# Altium PCB yampad_v2(1).PcbDoc
Units mm, origin at the board's own origin, x right, y up, seen from the top; angles counter-clockwise.
Board outline 94.49 x 95 mm, 2 copper layers (F.Cu, B.Cu); 66 components, 49 nets, 261 pads, 64 vias.
Unrouted connection lines stored in the file: 2.
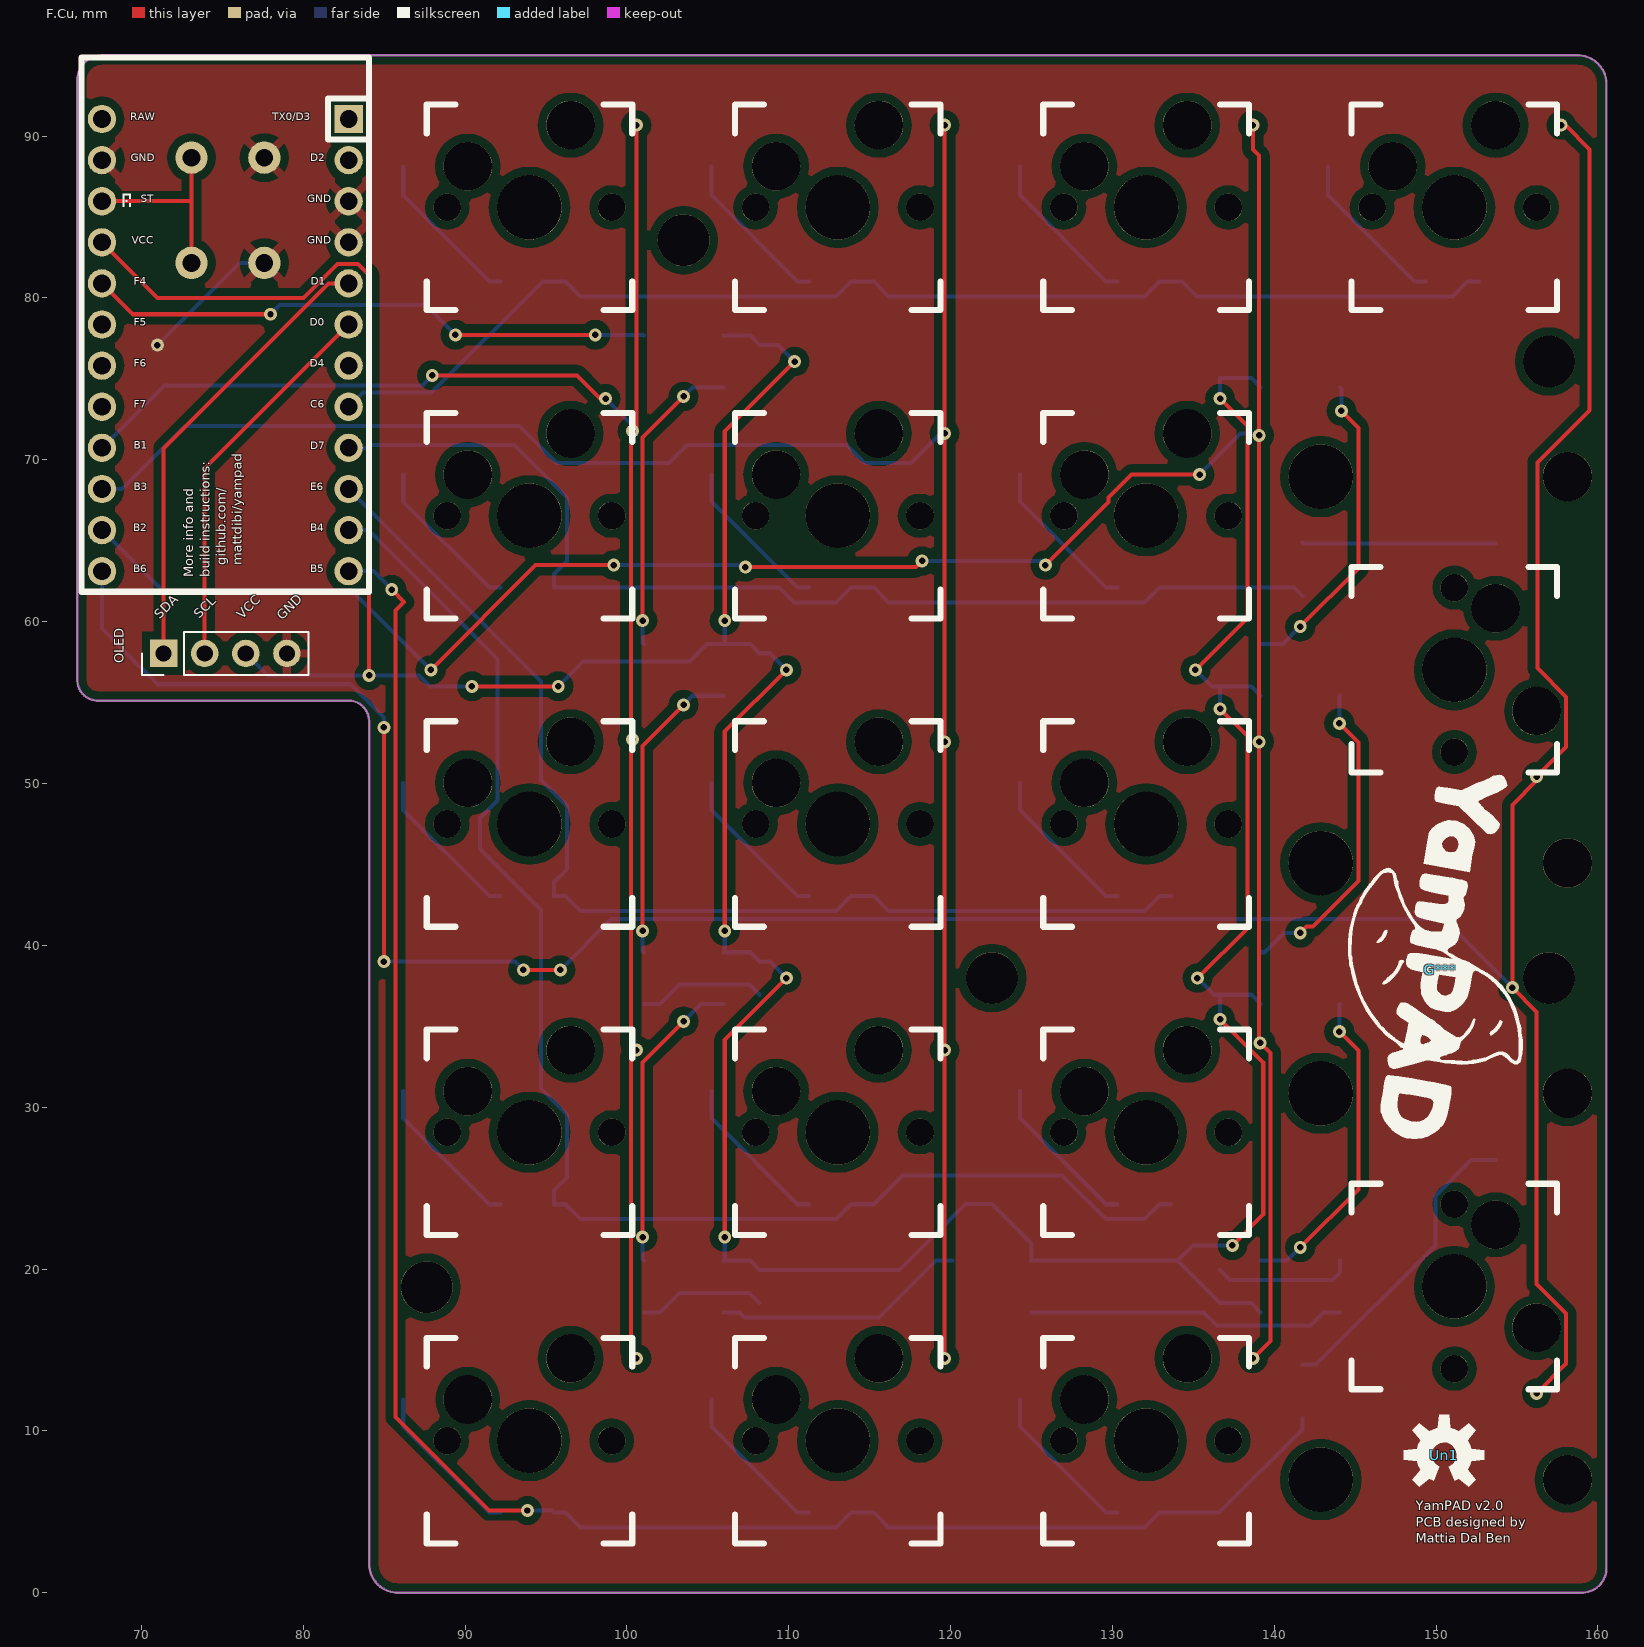
[diagram p0: F.Cu view]
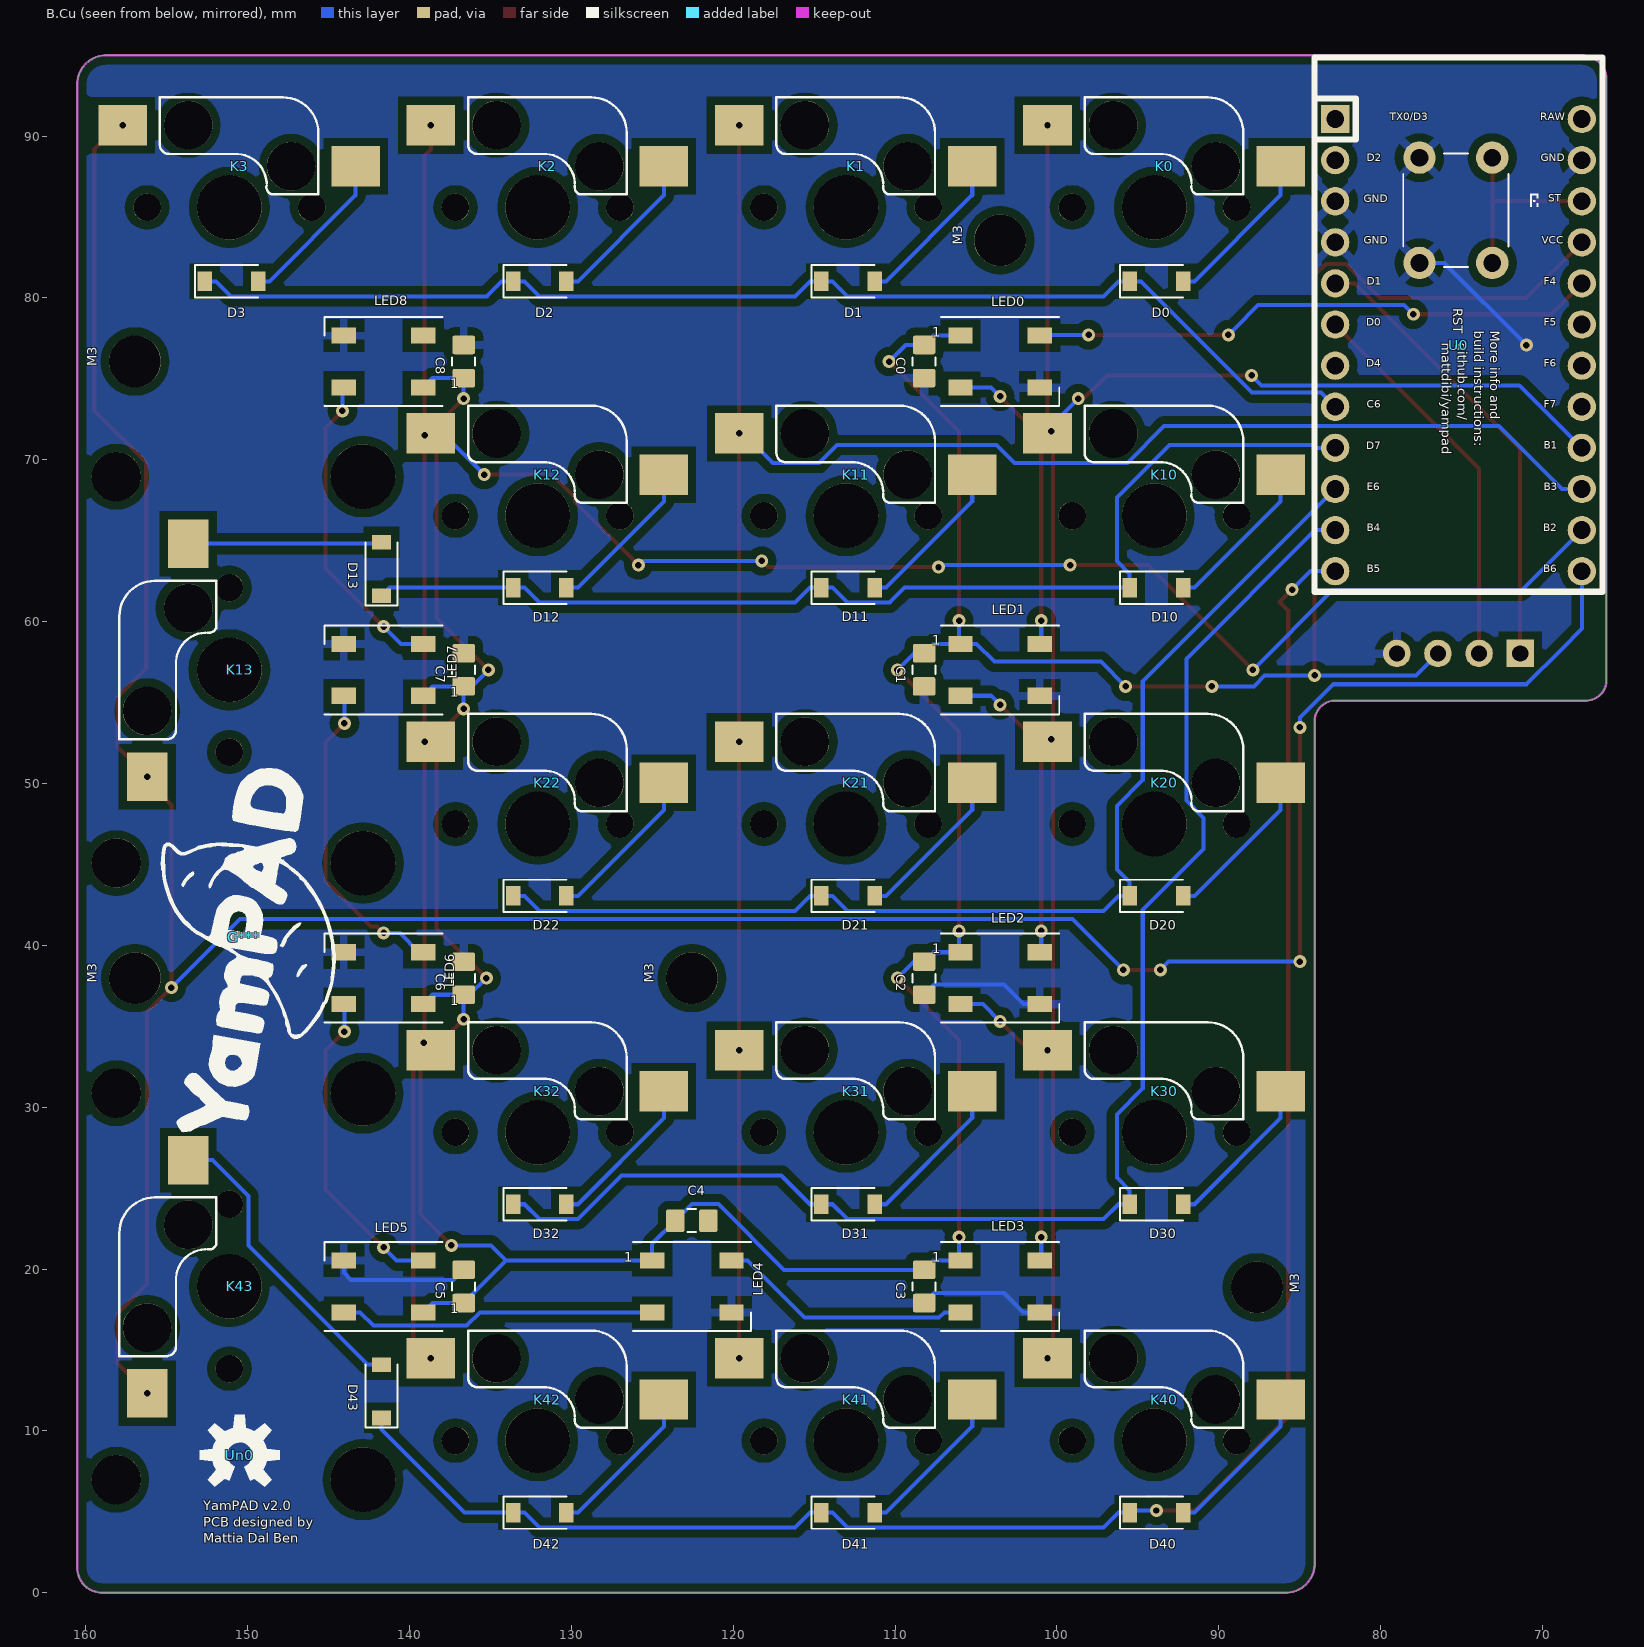
[diagram p1: B.Cu view, seen from below]

## Layer stack, top to bottom
F.Mask: solder mask 0.0102, Solder Resist, Dk 3.5
F.Cu: signal copper 0.0356
Dielectric 1: dielectric 0.32, FR-4, Dk 4.8
B.Cu: signal copper 0.0356
B.Mask: solder mask 0.0102, Solder Resist, Dk 3.5

## Board outline
158.75,94.996 67.564,94.996 ccw(c67.564,93.472) 66.04,93.472 66.04,56.388 ccw(c67.31,56.388) 67.31,55.118 82.804,55.118 cw(c82.804,53.848) 84.074,53.848 84.074,1.778 ccw(c85.852,1.778) 85.852,0 159.004,0 ccw(c159.004,1.524) 160.528,1.524 160.528,93.218 ccw(c158.75,93.218) 158.75,94.996

## Design rules (kind name [scope] priority, off if disabled: settings)
Clearance "Clearence 0.508_Polygon" [InNamedPolygon('F.Cu-GND') OR InNamedPolygon('B.Cu-GND')] p1: gap=0.508 ignorepadtopadclearanceinfootprint=FALSE
Clearance "Clearence 0.2_NetClass" [InNetClass('Default')] p2: gap=0.2 ignorepadtopadclearanceinfootprint=FALSE
HoleSize "Hole Size (Default)" [All] p1: absolutevalues=TRUE maxlimit=10 minlimit=0.3 maxpercent=80.000 minpercent=20.000
MinimumSolderMaskSliver [All] p1: minsoldermaskwidth=0
PolygonConnect Polygon_B.Cu-GND_ConnectDirect [IsNamedPolygon('B.Cu-GND') vs IsVia] p1: connectstyle=Direct reliefconductorwidth=0.254 reliefentries=4 polygonreliefangle="90 Angle" airgapwidth=0.254
PolygonConnect Polygon_B.Cu-GND_ConnectRelief45 [IsNamedPolygon('B.Cu-GND') vs (IsThruPin or IsSMTPin) and (PadShape_AllLayers = 'Round')] p2: connectstyle=Relief reliefconductorwidth=0.508 reliefentries=4 polygonreliefangle="45 Angle" airgapwidth=0.508
PolygonConnect Polygon_B.Cu-GND_ConnectRelief90 [IsNamedPolygon('B.Cu-GND') vs (IsThruPin or IsSMTPin) and (PadShape_AllLayers <> 'Round')] p3: connectstyle=Relief reliefconductorwidth=0.508 reliefentries=4 polygonreliefangle="90 Angle" airgapwidth=0.508
PolygonConnect Polygon_F.Cu-GND_ConnectDirect [IsNamedPolygon('F.Cu-GND') vs IsVia] p4: connectstyle=Direct reliefconductorwidth=0.254 reliefentries=4 polygonreliefangle="90 Angle" airgapwidth=0.254
PolygonConnect Polygon_F.Cu-GND_ConnectRelief45 [IsNamedPolygon('F.Cu-GND') vs (IsThruPin or IsSMTPin) and (PadShape_AllLayers = 'Round')] p5: connectstyle=Relief reliefconductorwidth=0.508 reliefentries=4 polygonreliefangle="45 Angle" airgapwidth=0.508
PolygonConnect Polygon_F.Cu-GND_ConnectRelief90 [IsNamedPolygon('F.Cu-GND') vs (IsThruPin or IsSMTPin) and (PadShape_AllLayers <> 'Round')] p6: connectstyle=Relief reliefconductorwidth=0.508 reliefentries=4 polygonreliefangle="90 Angle" airgapwidth=0.508
RoutingVias [All] p1: holewidth=0.711 width=1.27 viastyle="Through Hole" minholewidth=0.711 minwidth=1.27 maxholewidth=0.711 maxwidth=1.27
SilkToSilkClearance [All] p1: silktosilkclearance=0
SilkToSolderMaskClearance [IsPad] p1: minsilkscreentomaskgap=0 clearancetoexposedcopper=TRUE
SolderMaskExpansion [All] p1: expansion=0.102 istentingtop=FALSE
Width [All] p1: maxlimit=10 minlimit=0.2 preferedwidth=0.25 minimp=50.000000 maximp=50.000000 favimp=50.000000
26 further rules are at their usual default settings.

## Classes and differential pairs
net class Default: COL0 COL1 COL2 COL3 GND LEDs Net-(D0-Pad2) Net-(D1-Pad2) Net-(D2-Pad2) Net-(D3-Pad2) Net-(D10-Pad2) Net-(D11-Pad2) Net-(D12-Pad2) Net-(D13-Pad2) Net-(D20-Pad2) Net-(D21-Pad2) Net-(D22-Pad2) Net-(D30-Pad2) Net-(D31-Pad2) Net-(D32-Pad2) Net-(D40-Pad2) Net-(D41-Pad2) Net-(D42-Pad2) Net-(D43-Pad2) Net-(LED0-Pad2) Net-(LED1-Pad2) Net-(LED2-Pad2) Net-(LED3-Pad2) Net-(LED4-Pad2) Net-(LED5-Pad2) Net-(LED6-Pad2) Net-(LED7-Pad2) Net-(LED8-Pad2) Net-(U0-Pad1) Net-(U0-Pad2) Net-(U0-Pad7) Net-(U0-Pad18) Net-(U0-Pad19) Net-(U0-Pad24) PF7 ROW0 ROW1 ROW2 ROW3 ROW4 RST SCL SDA VCC

## Components (designator, comment, footprint, x,y, rotation, side; value= is the part's Value field where it differs from the comment)
C0 "104" C_0805_2012Metric_Pad1.15x1.40mm_HandSolder 108.204,76.073 r270 bottom
C1 "104" C_0805_2012Metric_Pad1.15x1.40mm_HandSolder 108.204,57.023 r270 bottom
C2 "104" C_0805_2012Metric_Pad1.15x1.40mm_HandSolder 108.204,37.973 r270 bottom
C3 "104" C_0805_2012Metric_Pad1.15x1.40mm_HandSolder 108.204,18.923 r270 bottom
C4 "104" C_0805_2012Metric_Pad1.15x1.40mm_HandSolder 122.555,22.987 r180 bottom
C5 "104" C_0805_2012Metric_Pad1.15x1.40mm_HandSolder 136.652,18.923 r90 bottom
C6 "104" C_0805_2012Metric_Pad1.15x1.40mm_HandSolder 136.652,37.973 r90 bottom
C7 "104" C_0805_2012Metric_Pad1.15x1.40mm_HandSolder 136.652,57.023 r90 bottom
C8 "104" C_0805_2012Metric_Pad1.15x1.40mm_HandSolder 136.652,76.073 r90 bottom
D0 "D" D_SOD-123 93.853,81.026 r0 bottom
D1 "D" D_SOD-123 112.903,81.026 r0 bottom
D2 "D" D_SOD-123 131.953,81.026 r0 bottom
D3 "D" D_SOD-123 151.003,81.026 r0 bottom
D10 "D" D_SOD-123 93.853,62.103 r0 bottom
D11 "D" D_SOD-123 112.903,62.103 r0 bottom
D12 "D" D_SOD-123 131.953,62.103 r0 bottom
D13 "D" D_SOD-123 141.732,63.246 r270 bottom
D20 "D" D_SOD-123 93.853,43.053 r0 bottom
D21 "D" D_SOD-123 112.903,43.053 r0 bottom
D22 "D" D_SOD-123 131.953,43.053 r0 bottom
D30 "D" D_SOD-123 93.853,24.003 r0 bottom
D31 "D" D_SOD-123 112.903,24.003 r0 bottom
D32 "D" D_SOD-123 131.953,24.003 r0 bottom
D40 "D" D_SOD-123 93.853,4.953 r0 bottom
D41 "D" D_SOD-123 112.903,4.953 r0 bottom
D42 "D" D_SOD-123 131.953,4.953 r0 bottom
D43 "D" D_SOD-123 141.732,12.446 r270 bottom
G*** "LOGO" yampad-logo 150.241,38.481 r260 top
G*** "LOGO" yampad-logo 150.241,40.513 r280 bottom
K0 "KEYSW" Kailh-PCB-Socket-1U-Cutout#1 93.98,85.598 r0 top
K1 "KEYSW" Kailh-PCB-Socket-1U-Cutout#2 113.03,85.598 r0 top
K2 "KEYSW" Kailh-PCB-Socket-1U-Cutout#2 132.08,85.598 r0 top
K3 "KEYSW" Kailh-PCB-Socket-1U-Cutout#1 151.13,85.598 r0 top
K10 "KEYSW" Kailh-PCB-Socket-1U-Cutout#1 93.98,66.548 r0 top
K11 "KEYSW" Kailh-PCB-Socket-1U-Cutout#2 113.03,66.548 r0 top
K12 "KEYSW" Kailh-PCB-Socket-1U-Cutout#1 132.08,66.548 r0 top
K13 "KEYSW" Kailh-PCB-Socket-2U 151.13,57.023 r270 top
K20 "KEYSW" Kailh-PCB-Socket-1U-Cutout#1 93.98,47.498 r0 top
K21 "KEYSW" Kailh-PCB-Socket-1U-Cutout#2 113.03,47.498 r0 top
K22 "KEYSW" Kailh-PCB-Socket-1U-Cutout#1 132.08,47.498 r0 top
K30 "KEYSW" Kailh-PCB-Socket-1U-Cutout#2 93.98,28.448 r0 top
K31 "KEYSW" Kailh-PCB-Socket-1U-Cutout#1 113.03,28.448 r0 top
K32 "KEYSW" Kailh-PCB-Socket-1U-Cutout#2 132.08,28.448 r0 top
K40 "KEYSW" Kailh-PCB-Socket-1U-Cutout#1 93.98,9.398 r0 top
K41 "KEYSW" Kailh-PCB-Socket-1U-Cutout#2 113.03,9.398 r0 top
K42 "KEYSW" Kailh-PCB-Socket-1U-Cutout#1 132.08,9.398 r0 top
K43 "KEYSW" Kailh-PCB-Socket-2U 151.13,18.923 r270 top
LED0 "WS2812B" LED_WS2812B_PLCC4_5.0x5.0mm_P3.2mm 103.505,76.073 r0 bottom
LED1 "WS2812B" LED_WS2812B_PLCC4_5.0x5.0mm_P3.2mm 103.505,57.023 r0 bottom
LED2 "WS2812B" LED_WS2812B_PLCC4_5.0x5.0mm_P3.2mm 103.505,37.973 r0 bottom
LED3 "WS2812B" LED_WS2812B_PLCC4_5.0x5.0mm_P3.2mm 103.505,18.923 r0 bottom
LED4 "WS2812B" LED_WS2812B_PLCC4_5.0x5.0mm_P3.2mm 122.555,18.923 r0 bottom
LED5 "WS2812B" LED_WS2812B_PLCC4_5.0x5.0mm_P3.2mm 141.605,18.923 r180 bottom
LED6 "WS2812B" LED_WS2812B_PLCC4_5.0x5.0mm_P3.2mm 141.605,37.973 r180 bottom
LED7 "WS2812B" LED_WS2812B_PLCC4_5.0x5.0mm_P3.2mm 141.605,57.023 r180 bottom
LED8 "WS2812B" LED_WS2812B_PLCC4_5.0x5.0mm_P3.2mm 141.605,76.073 r180 bottom
M3 "MountingHole_3.2mm_M3" MountingHole_3.2mm_M3 87.63,18.872 r180 bottom
M3 "MountingHole_3.2mm_M3" MountingHole_3.2mm_M3 156.972,37.973 r180 bottom
M3 "MountingHole_3.2mm_M3" MountingHole_3.2mm_M3 156.972,76.073 r180 bottom
M3 "MountingHole_3.2mm_M3" MountingHole_3.2mm_M3 122.555,37.973 r180 bottom
M3 "MountingHole_3.2mm_M3" MountingHole_3.2mm_M3 103.505,83.566 r180 bottom
OLED "Conn_01x04" PinHeader_1x04_P2.54mm_Vertical 71.374,58.039 r90 top
RST "SW_Push" SW_PUSH_6mm 77.597,82.169 r270 bottom
U0 "ProMicro" ArduinoProMicro 75.184,77.089 r90 bottom
Un0 "" OSHW-LOGO-M 150.495,8.509 r0 bottom
Un1 "" OSHW-LOGO-M 150.495,8.509 r0 top

## Footprints (in the part's own frame and the unit in brackets; to place one, negate y for a bottom-side part, rotate by r counter-clockwise, add the part's x,y. Pads: shape width x height; smd on the part's side, far side on the other; paste and mask are expansions set on the pad)
ArduinoProMicro [mil]
  rect 69x69 hole 43 paste-69 mask+2.01: 1(550,300)
  round 69 hole 43 paste-69 mask+2.01: 2(450,300) 3(350,300) 4(250,300) 5(150,300) 6(50,300) 7(-50,300) 8(-150,300) 9(-250,300) 10(-350,300) 11(-450,300) 12(-550,300) 13(-550,-300) 14(-450,-300) 15(-350,-300) 16(-250,-300) 17(-150,-300) 18(-50,-300) 19(50,-300) 20(150,-300) 21(250,-300) 22(350,-300) 23(450,-300) 24(550,-300)
  silkscreen extent -600,-350 700,350
C_0805_2012Metric_Pad1.15x1.40mm_HandSolder [mm]
  rrect22% 1.15x1.4 smd mask+0.051: 1(1.025,0) 2(-1.025,0)
  silkscreen extent -0.26,-0.71 0.26,0.71
D_SOD-123 [mm]
  rect 0.9x1.2 smd mask+0.051: 1(1.65,0) 2(-1.65,0)
  silkscreen extent -1.65,-1 2.25,1
Kailh-PCB-Socket-1U-Cutout#1 [mm]
  rect 3x2.5 smd far side mask+0.051: 1(6.6,5.08) 2(-7.8,2.54)
  round 3.988 hole 3.988 paste-3.988 mask+0.051: Un1(0,0)
  round 1.702 hole 1.702 paste-1.702 mask+0.051: Un2(-5.08,0) Un3(5.08,0)
  round 3 hole 3 paste-3 mask+0.051: Un4(2.54,5.08) Un5(-3.81,2.54)
  silkscreen extent -6.35,-6.35 6.35,6.35
Kailh-PCB-Socket-1U-Cutout#2 [mm]
  rect 3x2.5 smd far side mask+0.051: 1(6.6,5.08) 2(-7.8,2.54)
  round 3 hole 3 paste-3 mask+0.051: Un1(-3.81,2.54) Un2(2.54,5.08)
  round 1.702 hole 1.702 paste-1.702 mask+0.051: Un3(5.08,0) Un4(-5.08,0)
  round 3.988 hole 3.988 paste-3.988 mask+0.051: Un5(0,0)
  silkscreen extent -6.35,-6.35 6.35,6.35
Kailh-PCB-Socket-2U [mil]
  rect 118.11x98.43 smd far side mask+2.01: 1(259.84,200) 2(-307.09,100)
  round 157 hole 157 paste-157 mask+2.01: Un1(0,0) Un6(-470,-325) Un7(470,-325)
  round 67 hole 67 paste-67 mask+2.01: Un2(-200,0) Un3(200,0)
  round 120 hole 120 paste-120 mask+2.01: Un4(-470,275) Un5(470,275)
  round 118.11 hole 118.11 paste-118.11 mask+2.01: Un8(100,200) Un9(-150,100)
  silkscreen extent -250,-250 250,250
LED_WS2812B_PLCC4_5.0x5.0mm_P3.2mm [mm]
  rect 1.5x1 smd mask+0.051: 1(2.45,-1.6) 2(2.45,1.6) 3(-2.45,1.6) 4(-2.45,-1.6)
  silkscreen extent -3.65,-2.75 3.65,2.75
MountingHole_3.2mm_M3 [mm]
  round 3.2 hole 3.2 paste-3.2 mask+0.051: 1(0,0)
OSHW-LOGO-M [mm]
  silkscreen extent -2.48,-2.48 2.48,1.97
PinHeader_1x04_P2.54mm_Vertical [mm]
  rect 1.7x1.7 hole 1 paste-1.7 mask+0.051: 1(0,0)
  rrect100% 1.7x1.7 hole 1 paste-1.7 mask+0.051: 2(0,-2.54) 3(0,-5.08) 4(0,-7.62)
  silkscreen extent -1.33,-8.95 1.33,1.33
SW_PUSH_6mm [mm]
  round 2 hole 1.1 paste-2 mask+0.051: 1(-6.5,0) 1(0,0) 2(-6.5,4.5) 2(0,4.5)
  silkscreen extent -6.75,-1 0.25,5.5
yampad-logo [mm]
  silkscreen extent -12.52,-5.94 10.6,5.89

## Part data
C0 C1 C2 C3 C4 C5 C6 C7 C8: library part C_0805_2012Metric_Pad1.15x1.40mm_HandSolder, "Capacitor SMD 0805 (2012 Metric), square (rectangular) end terminal, IPC_7351 nominal with elongated pad for handsoldering. (Body size source: https://docs.google.com/spreadsheets/d/1BsfQQcO9C6DZCsRaXUlFlo91Tg2WpOkGARC1WS5S8t0/edit?usp=sharing), generated with kicad-footprint-generator"
D0 D1 D2 D3 D10 D11 D12 D13 D20 D21 D22 D30 D31 D32 D40 D41 D42 D43: library part D_SOD-123, "SOD-123"
G*** G***: library part yampad-logo
K0 K1 K2 K3 K10 K11 K12 K20 K21 K22 K30 K31 K32 K40 K41 K42: library part Kailh-PCB-Socket-1U-Cutout, "MXALPS"
K13 K43: library part Kailh-PCB-Socket-2U, "MXALPS"
LED0 LED1 LED2 LED3 LED4 LED5 LED6 LED7 LED8: library part LED_WS2812B_PLCC4_5.0x5.0mm_P3.2mm, "https://cdn-shop.adafruit.com/datasheets/WS2812B.pdf"
M3 M3 M3 M3 M3: "Mounting Hole 3.2mm, no annular, M3"
OLED: library part PinHeader_1x04_P2.54mm_Vertical, "Through hole straight pin header, 1x04, 2.54mm pitch, single row"
RST: library part SW_PUSH_6mm, "https://www.omron.com/ecb/products/pdf/en-b3f.pdf"
U0: library part ArduinoProMicro
Un0 Un1: library part OSHW-LOGO-M, "OPEN-SOURCE HARDWARE (OSHW) LOGO - MEDIUM - SILKSCREEN"

## Via types
v1: diameter 0.8, hole 0.4, F.Cu to B.Cu, tented both sides, 64 vias

## Nets (pads, with @x,y where several pads share a name; then routed paths per layer and width w, separated by ;. In a path a pad name is that pad's centre, name@x,y a point inside that pad or via, vN(x,y) a via of type N, cw(c..) or ccw(c..) an arc to the next point about the centre after c; other vN are vias at no path point)
COL0: K0.1 K10.1 K20.1 K30.1 K40.1 U0.16 | length 113.4
  F.Cu w0.25: v1(87.973,75.222) 96.911,75.222 98.346,73.787 v1(98.679,73.787) ; v1(100.58,14.478) 100.24,14.818 100.24,33.188 v1(100.58,33.528) 100.24,33.868 100.24,52.038 100.36,52.158 v1(100.36,52.723) 100.24,52.843 100.24,71.088 100.36,71.208 v1(100.36,71.773) 100.58,71.993 v1(100.58,90.678)
  B.Cu w0.25: U0.16 71.43,74.605 87.357,74.605 v1(87.973,75.222) ; v1(98.679,73.787) 100.58,71.886 K10.1
COL1: K1.1 K11.1 K21.1 K31.1 K41.1 U0.15 | length 132.5
  F.Cu w0.25: v1(119.63,14.478) v1(119.63,33.528) v1(119.63,52.578) v1(119.63,71.628) v1(119.63,90.678)
  B.Cu w0.25: U0.15 68.803,68.199 72.682,72.078 93.369,72.078 95.644,69.803 102.61,69.803 103.72,70.913 113.584,70.913 114.694,69.803 117.555,69.803 119.38,71.628 v1(119.63,71.628)
COL2: K2.1 K12.1 K22.1 K32.1 K42.1 U0.14 | length 158.3
  F.Cu w0.25: v1(87.884,57.023) 94.361,63.5 v1(99.187,63.5) ; v1(107.315,63.373) 117.856,63.373 v1(118.237,63.754) ; v1(125.857,63.5) 129.761,67.404 129.761,67.661 131.188,69.088 v1(135.382,69.088) ; v1(138.68,14.478) 139.769,15.567 139.769,33.341 v1(139.131,33.979) 139.061,34.049 v1(139.061,52.578) v1(139.061,71.516) 139.061,88.797 138.68,89.178 v1(138.68,90.678)
  B.Cu w0.25: U0.14 71.305,61.918 82.989,61.918 v1(87.884,57.023) ; v1(99.187,63.5) 107.188,63.5 v1(107.315,63.373) ; v1(118.237,63.754) 125.603,63.754 v1(125.857,63.5) ; v1(135.382,69.088) 137.922,71.628 K12.1
COL3: K3.1 K13.1 K43.1 U0.13 | length 196.1
  F.Cu w0.25: v1(84.98,38.989) v1(84.98,53.467) ; v1(93.599,38.481) v1(95.885,38.481) ; v1(156.21,12.323) 158.035,14.148 158.035,17.259 156.21,19.084 156.21,35.886 v1(154.71,37.386) 154.71,48.673 156.21,50.173 v1(156.21,50.423) 158.035,52.248 158.035,55.359 156.266,57.128 156.266,69.849 159.48,73.063 159.48,89.178 157.98,90.678 v1(157.73,90.678)
  B.Cu w0.25: U0.13 67.564,59.564 68.834,58.294 70.994,56.134 82.915,56.134 84.98,54.069 v1(84.98,53.467) ; v1(84.98,38.989) 93.091,38.989 v1(93.599,38.481) ; v1(95.885,38.481) 99.023,41.619 150.477,41.619 v1(154.71,37.386)
GND: C0.1 C1.1 C2.1 C3.1 C4.1 C5.1 C6.1 C7.1 C8.1 LED0.3 LED1.3 LED2.3 LED3.3 LED4.3 LED5.3 LED6.3 LED7.3 LED8.3 OLED.4 RST.1 U0.3 U0.4 U0.23 | length 33.1
  B.Cu w0.25: v1(70.993,77.089) 76.073,82.169 RST.1@77.597,82.169 ; LED3.3 102.055,17.323 103.253,18.521 107.581,18.521 C3.1 ; LED2.3 102.055,36.373 103.253,37.571 107.581,37.571 C2.1 ; C5.1 137.275,19.325 143.607,19.325 144.055,19.773 LED5.3
LEDs: LED0.4 U0.20 | length 35.3
  F.Cu w0.25: U0.20 69.469,78.994 v1(77.978,78.994) ; v1(89.408,77.724) v1(98.044,77.724)
  B.Cu w0.25: v1(77.978,78.994) 78.544,79.56 87.572,79.56 89.008,78.124 v1(89.408,77.724) ; v1(98.044,77.724) 101.004,77.724 LED0.4
Net-(D0-Pad2): D0.2 K0.2 | length 10
  B.Cu w0.25: K0.2 86.18,86.349 91.503,81.026 D0.2
Net-(D1-Pad2): D1.2 K1.2 | length 10
  B.Cu w0.25: K1.2 105.23,86.349 110.553,81.026 D1.2
Net-(D2-Pad2): D2.2 K2.2 | length 10
  B.Cu w0.25: K2.2 124.28,86.349 129.603,81.026 D2.2
Net-(D3-Pad2): D3.2 K3.2 | length 10
  B.Cu w0.25: K3.2 143.33,86.349 148.653,81.026 D3.2
Net-(D10-Pad2): D10.2 K10.2 | length 9.9
  B.Cu w0.25: K10.2 86.18,67.426 91.503,62.103 D10.2
Net-(D11-Pad2): D11.2 K11.2 | length 9.9
  B.Cu w0.25: K11.2 105.23,67.426 110.553,62.103 D11.2
Net-(D12-Pad2): D12.2 K12.2 | length 9.9
  B.Cu w0.25: K12.2 124.28,67.426 129.603,62.103 D12.2
Net-(D13-Pad2): D13.2 K13.2 | length 12
  B.Cu w0.25: D13.2 141.805,64.823 K13.2
Net-(D20-Pad2): D20.2 K20.2 | length 9.9
  B.Cu w0.25: K20.2 86.18,48.376 91.503,43.053 D20.2
Net-(D21-Pad2): D21.2 K21.2 | length 9.9
  B.Cu w0.25: K21.2 105.23,48.376 110.553,43.053 D21.2
Net-(D22-Pad2): D22.2 K22.2 | length 9.9
  B.Cu w0.25: K22.2 124.28,48.376 129.603,43.053 D22.2
Net-(D30-Pad2): D30.2 K30.2 | length 9.9
  B.Cu w0.25: K30.2 86.18,29.326 91.503,24.003 D30.2
Net-(D31-Pad2): D31.2 K31.2 | length 9.9
  B.Cu w0.25: K31.2 105.23,29.326 110.553,24.003 D31.2
Net-(D32-Pad2): D32.2 K32.2 | length 9.9
  B.Cu w0.25: K32.2 124.28,29.326 129.603,24.003 D32.2
Net-(D40-Pad2): D40.2 K40.2 | length 9.9
  B.Cu w0.25: K40.2 86.18,10.276 91.503,4.953 D40.2
Net-(D41-Pad2): D41.2 K41.2 | length 9.9
  B.Cu w0.25: K41.2 105.23,10.276 110.553,4.953 D41.2
Net-(D42-Pad2): D42.2 K42.2 | length 9.9
  B.Cu w0.25: K42.2 124.28,10.276 129.603,4.953 D42.2
Net-(D43-Pad2): D43.2 K43.2 | length 18.9
  B.Cu w0.25: D43.2 142.582,14.096 149.954,21.468 149.954,24.507 152.17,26.723 K43.2
Net-(LED0-Pad2): LED0.2 LED1.4 | length 19.1
  F.Cu w0.25: v1(100.965,60.071) 100.965,71.374 v1(103.505,73.914)
  B.Cu w0.25: v1(100.965,60.071) 100.965,58.713 LED1.4 ; v1(103.505,73.914) 104.064,74.473 LED0.2
Net-(LED1-Pad2): LED1.2 LED2.4 | length 19.1
  F.Cu w0.25: v1(100.965,40.894) 100.965,52.324 v1(103.505,54.864)
  B.Cu w0.25: v1(100.965,40.894) 100.965,39.663 LED2.4 ; v1(103.505,54.864) 104.064,55.423 LED1.2
Net-(LED2-Pad2): LED2.2 LED3.4 | length 18.8
  F.Cu w0.25: v1(100.965,21.971) 100.965,32.766 v1(103.505,35.306)
  B.Cu w0.25: v1(100.965,21.971) 100.965,20.613 LED3.4 ; v1(103.505,35.306) 104.572,36.373 LED2.2
Net-(LED3-Pad2): LED3.2 LED4.4 | length 15.7
  B.Cu w0.25: LED3.2 106.955,17.323 107.28,16.998 115.58,16.998 119.105,20.523 LED4.4
Net-(LED4-Pad2): LED4.2 LED5.4 | length 19.7
  B.Cu w0.25: LED4.2 135.639,17.323 136.464,16.498 142.23,16.498 143.055,17.323 LED5.4
Net-(LED5-Pad2): LED5.2 LED6.4 | length 19.8
  F.Cu w0.25: v1(141.605,21.336) 145.194,24.925 145.194,33.495 v1(144.018,34.671)
  B.Cu w0.25: LED5.2 140.792,20.523 v1(141.605,21.336) ; v1(144.018,34.671) 144.018,36.336 LED6.4
Net-(LED6-Pad2): LED6.2 LED7.4 | length 19.8
  F.Cu w0.25: v1(141.605,40.767) 142.005,41.167 142.389,41.167 145.194,43.972 145.194,52.545 v1(144.018,53.721)
  B.Cu w0.25: LED6.2 139.405,39.573 140.599,40.767 v1(141.605,40.767) ; v1(144.018,53.721) 144.018,55.386 LED7.4
Net-(LED7-Pad2): LED7.2 LED8.4 | length 19.6
  F.Cu w0.25: v1(141.605,59.69) 145.194,63.279 145.194,71.976 v1(144.145,73.025)
  B.Cu w0.25: LED7.2 140.538,58.623 v1(141.605,59.69) ; LED8.4 144.145,74.383 v1(144.145,73.025)
Net-(LED8-Pad2): LED8.2
Net-(U0-Pad1): U0.1
Net-(U0-Pad2): U0.2
Net-(U0-Pad7): U0.7
Net-(U0-Pad18): U0.18
Net-(U0-Pad19): U0.19
Net-(U0-Pad24): U0.24
PF7: U0.17
ROW0: D0.1 D1.1 D2.1 D3.1 U0.8 | length 75.4
  B.Cu w0.25: U0.8 83.68,74.155 87.932,74.155 94.803,81.026 D0.1 96.203,81.026 97.128,80.101 112.928,80.101 113.853,81.026 D1.1 115.253,81.026 116.178,80.101 131.978,80.101 132.903,81.026 D2.1 134.303,81.026 135.228,80.101 151.028,80.101 151.953,81.026 D3.1
ROW1: D10.1 D11.1 D12.1 D13.1 U0.9 | length 68.8
  B.Cu w0.25: U0.9 84.043,70.739 84.217,70.913 93.047,70.913 96.299,67.661 96.299,63.749 95.503,62.953 D10.1 109.402,62.103 110.327,61.178 112.928,61.178 113.853,62.103 D11.1 115.253,62.103 116.178,61.178 131.978,61.178 132.903,62.103 D12.1 141.225,62.103 D13.1
ROW2: D20.1 D21.1 D22.1 U0.10 | length 70.7
  B.Cu w0.25: U0.10 94.695,56.308 94.695,50.215 96.299,48.611 96.299,44.699 95.503,43.903 D20.1 96.203,43.053 97.128,42.128 112.928,42.128 113.853,43.053 D21.1 115.253,43.053 116.178,42.128 131.978,42.128 132.903,43.053 D22.1
ROW3: D30.1 D31.1 D32.1 U0.11 | length 90.3
  B.Cu w0.25: U0.11 84.043,65.659 91.995,57.707 91.995,48.945 90.932,47.882 90.932,45.959 94.695,42.196 94.695,31.165 96.299,29.561 96.299,25.649 95.503,24.853 D30.1 96.203,24.003 97.128,23.078 112.928,23.078 113.853,24.003 D31.1 115.253,24.003 117.031,25.781 126.89,25.781 129.593,23.078 131.978,23.078 132.903,24.003 D32.1
ROW4: D40.1 D41.1 D42.1 D43.1 U0.12 | length 117.6
  F.Cu w0.25: v1(85.471,61.976) 86.233,61.214 85.705,60.686 85.705,10.853 91.478,5.08 v1(93.853,5.08)
  B.Cu w0.25: U0.12 84.328,63.119 v1(85.471,61.976) ; v1(93.853,5.08) 95.376,5.08 D40.1 96.203,4.953 97.128,4.028 112.928,4.028 113.853,4.953 D41.1 115.253,4.953 116.178,4.028 131.978,4.028 132.903,4.953 D42.1 136.589,4.953 141.732,10.096 D43.1
RST: RST.2 U0.22 | length 12
  F.Cu w0.25: U0.22 68.803,85.979 73.097,85.979 ; RST.2@73.097,82.169 73.097,85.979 ; RST.2@73.097,88.669 73.097,87.255 73.097,85.979
SCL: OLED.2 U0.6 | length 24
  F.Cu w0.25: OLED.2 73.914,69.469 U0.6
SDA: OLED.1 U0.5 | length 28.3
  F.Cu w0.25: OLED.1 71.374,59.139 71.374,70.708 81.565,80.899 U0.5
VCC: C0.2 C1.2 C2.2 C3.2 C4.2 C5.2 C6.2 C7.2 C8.2 LED0.1 LED1.1 LED2.1 LED3.1 LED4.1 LED5.1 LED6.1 LED7.1 LED8.1 OLED.3 U0.21 | length 258.6
  F.Cu w0.25: U0.21 71.008,79.995 80.025,79.995 82.13,82.1 83.381,82.1 84.074,81.407 v1(84.074,56.675) ; v1(90.424,56.007) v1(95.758,56.007) ; v1(106.045,21.971) 106.045,34.163 v1(109.855,37.973) ; v1(106.045,40.894) 106.045,53.213 v1(109.855,57.023) ; v1(106.045,60.071) 106.045,71.755 v1(110.363,76.073) ; v1(135.128,57.023) 138.336,60.231 138.336,72.103 v1(136.652,73.787) ; v1(135.255,37.973) 138.336,41.054 138.336,52.926 v1(136.652,54.61) ; v1(136.652,35.433) 139.319,32.766 139.319,23.368 v1(137.414,21.463)
  B.Cu w0.25: OLED.3 77.818,56.675 v1(84.074,56.675) 87.159,56.675 87.827,56.007 v1(90.424,56.007) ; v1(95.758,56.007) 97.282,57.531 103.863,57.531 104.955,58.623 LED1.1 ; LED0.1 107.629,77.673 C0.2 109.338,77.098 v1(110.363,76.073) ; v1(106.045,21.971) 106.045,20.613 LED3.1 107.629,20.523 C3.2 116.849,19.948 120.913,24.012 122.555,24.012 122.957,23.61 C4.2 125.005,21.562 LED4.1 134.027,20.523 ; v1(106.045,40.894) 106.045,39.663 LED2.1 107.629,39.573 C2.2 108.83,38.998 v1(109.855,37.973) ; v1(106.045,60.071) 106.045,58.713 LED1.1 ; v1(109.855,57.023) 108.83,58.048 C1.2 107.629,58.623 LED1.1 ; v1(135.128,57.023) 136.153,55.998 C7.2 ; v1(135.255,37.973) 136.28,36.948 C6.2 ; v1(136.652,35.433) C6.2 ; v1(136.652,54.61) C7.2 ; v1(136.652,73.787) C8.2 138.58,75.048 LED8.1 ; v1(137.414,21.463) 134.967,21.463 134.027,20.523 ; LED5.1 138.58,17.898 C5.2 134.027,20.523 ; LED6.1 138.58,36.948 C6.2 ; LED7.1 138.58,55.998 C7.2
pads on no net: K0.Un1 K0.Un2 K0.Un3 K0.Un4 K0.Un5 K1.Un1 K1.Un2 K1.Un3 K1.Un4 K1.Un5 K2.Un1 K2.Un2 K2.Un3 K2.Un4 K2.Un5 K3.Un1 K3.Un2 K3.Un3 K3.Un4 K3.Un5 K10.Un1 K10.Un2 K10.Un3 K10.Un4 K10.Un5 K11.Un1 K11.Un2 K11.Un3 K11.Un4 K11.Un5 K12.Un1 K12.Un2 K12.Un3 K12.Un4 K12.Un5 K13.Un1 K13.Un2 K13.Un3 K13.Un4 K13.Un5 K13.Un6 K13.Un7 K13.Un8 K13.Un9 K20.Un1 K20.Un2 K20.Un3 K20.Un4 K20.Un5 K21.Un1 K21.Un2 K21.Un3 K21.Un4 K21.Un5 K22.Un1 K22.Un2 K22.Un3 K22.Un4 K22.Un5 K30.Un1 K30.Un2 K30.Un3 K30.Un4 K30.Un5 K31.Un1 K31.Un2 K31.Un3 K31.Un4 K31.Un5 K32.Un1 K32.Un2 K32.Un3 K32.Un4 K32.Un5 K40.Un1 K40.Un2 K40.Un3 K40.Un4 K40.Un5 K41.Un1 K41.Un2 K41.Un3 K41.Un4 K41.Un5 K42.Un1 K42.Un2 K42.Un3 K42.Un4 K42.Un5 K43.Un1 K43.Un2 K43.Un3 K43.Un4 K43.Un5 K43.Un6 K43.Un7 K43.Un8 K43.Un9 M3.1

## Polygon pours and split planes (outlines as drawn)
GND on F.Cu "F.Cu-GND" (solid, remove dead copper, pour order 0): 160.528,94.996 160.528,0 84.074,0 84.074,55.118 66.04,55.118 66.04,94.869
GND on B.Cu "B.Cu-GND" (solid, remove dead copper, pour order 1): 160.528,94.996 160.528,0 84.074,0 84.074,55.118 66.04,55.118 66.04,94.869

## Keep-outs
Edge.Cuts:
  lines w0.15: 66.04,56.388 ccw(c67.31,56.388) 67.31,55.118 ; 66.04,56.388 ccw(c67.31,56.388) 67.31,55.118 ; 66.04,56.388 66.04,93.472 ; 66.04,56.388 66.04,93.472 ; 66.04,93.472 cw(c67.564,93.472) 67.564,94.996 ; 66.04,93.472 cw(c67.564,93.472) 67.564,94.996 ; 67.31,55.118 82.804,55.118 ; 67.31,55.118 82.804,55.118 ; 67.564,94.996 158.75,94.996 ; 67.564,94.996 158.75,94.996 ; 82.804,55.118 cw(c82.804,53.848) 84.074,53.848 ; 82.804,55.118 cw(c82.804,53.848) 84.074,53.848 ; 84.074,1.778 ccw(c85.852,1.778) 85.852,0 ; 84.074,1.778 ccw(c85.852,1.778) 85.852,0 ; 84.074,1.778 84.074,53.848 ; 84.074,1.778 84.074,53.848 ; 85.852,0 159.004,0 ; 85.852,0 159.004,0 ; 158.75,94.996 cw(c158.75,93.218) 160.528,93.218 ; 158.75,94.996 cw(c158.75,93.218) 160.528,93.218 ; 159.004,0 ccw(c159.004,1.524) 160.528,1.524 ; 159.004,0 ccw(c159.004,1.524) 160.528,1.524 ; 160.528,1.524 160.528,93.218 ; 160.528,1.524 160.528,93.218

## Silkscreen, mask and mechanical layers (free items; w line width, h text height)
F.SilkS:
  text "More info and / build instructions: /    github.com/ /    mattdibi/yampad" at 76.432,62.738 h1 r90
  text "SCL" at 73.725,59.988 h1 r45
  text "VCC" at 76.373,59.969 h1 r45
  text "SDA" at 71.277,59.953 h1 r45
  text "GND" at 78.85,59.906 h1 r45
  text "YamPAD v2.0 / PCB designed by / Mattia Dal Ben" at 148.756,2.873 h1
B.SilkS:
  text "More info and / build instructions: /    github.com/ /    mattdibi/yampad" at 76.432,77.978 h1 r90
  text "YamPAD v2.0 / PCB designed by / Mattia Dal Ben" at 152.742,2.873 h1
Dwgs.User:
  lines w0.2: 66.04,93.472 66.04,55.118 84.582,55.118 ; 84.074,55.118 84.074,0 84.582,0

## Text inside footprints (layer, text, board x,y; h text height)
LED0: B.SilkS "1" at 107.691,77.396 h1
LED1: B.SilkS "1" at 107.691,58.346 h1
LED2: B.SilkS "1" at 107.691,39.296 h1
LED3: B.SilkS "1" at 107.691,20.246 h1
LED4: B.SilkS "1" at 126.741,20.246 h1
LED5: B.SilkS "1" at 137.491,17.046 h1
LED6: B.SilkS "1" at 137.491,36.096 h1
LED7: B.SilkS "1" at 137.491,55.146 h1
LED8: B.SilkS "1" at 137.491,74.196 h1
U0: B.SilkS "TX0/D3" at 79.424,90.831 h0.8; B.SilkS "D2" at 80.868,88.295 h0.8; B.SilkS "D0" at 80.873,78.131 h0.8; B.SilkS "D1" at 80.839,80.678 h0.8; B.SilkS "GND" at 81.035,83.212 h0.8; B.SilkS "GND" at 81.035,85.752 h0.8; B.SilkS "D4" at 80.872,75.595 h0.8; B.SilkS "C6" at 80.853,73.051 h0.8; B.SilkS "D7" at 80.87,70.514 h0.8; B.SilkS "E6" at 80.855,67.974 h0.8; B.SilkS "B4" at 80.86,65.435 h0.8; B.SilkS "B5" at 80.855,62.894 h0.8; B.SilkS "B6" at 69.94,62.894 h0.8; B.SilkS "B3" at 69.929,67.971 h0.8; B.SilkS "B1" at 69.906,70.518 h0.8; B.SilkS "F4" at 69.919,80.675 h0.8; B.SilkS "VCC" at 70.042,83.212 h0.8; B.SilkS "ST" at 69.635,85.782 h0.8; B.SilkS "GND" at 70.113,88.292 h0.8; B.SilkS "RAW" at 70.139,90.833 h0.8; B.SilkS "F5" at 69.914,78.134 h0.8; B.SilkS "F6" at 69.92,75.594 h0.8; B.SilkS "F7" at 69.917,73.054 h0.8; B.SilkS "B2" at 69.934,65.435 h0.8; F.SilkS "ST" at 69.96,85.772 h0.8; F.SilkS "TX0/D3" at 78.087,90.831 h0.8; F.SilkS "B2" at 69.512,65.435 h0.8; F.SilkS "F7" at 69.529,73.054 h0.8; F.SilkS "F6" at 69.526,75.594 h0.8; F.SilkS "F5" at 69.532,78.134 h0.8; F.SilkS "RAW" at 69.307,90.833 h0.8; F.SilkS "GND" at 69.333,88.292 h0.8; F.SilkS "VCC" at 69.404,83.212 h0.8; F.SilkS "F4" at 69.527,80.675 h0.8; F.SilkS "B1" at 69.54,70.518 h0.8; F.SilkS "B3" at 69.517,67.971 h0.8; F.SilkS "B6" at 69.506,62.894 h0.8; F.SilkS "B5" at 80.435,62.894 h0.8; F.SilkS "B4" at 80.43,65.435 h0.8; F.SilkS "E6" at 80.435,67.974 h0.8; F.SilkS "D7" at 80.42,70.514 h0.8; F.SilkS "C6" at 80.437,73.051 h0.8; F.SilkS "D4" at 80.418,75.595 h0.8; F.SilkS "GND" at 80.255,85.752 h0.8; F.SilkS "GND" at 80.255,83.212 h0.8; F.SilkS "D1" at 80.451,80.678 h0.8; F.SilkS "D0" at 80.417,78.131 h0.8; F.SilkS "D2" at 80.422,88.295 h0.8